# Altium PCB shudian2.pcbdoc
Units mm, origin at the board's own origin, x right, y up, seen from the top; angles counter-clockwise.
Board outline 96.52 x 96.39 mm, 2 copper layers (Top Layer, Bottom Layer); 31 components, 56 nets, 220 pads, 4 vias.
Unrouted connection lines stored in the file: 19.
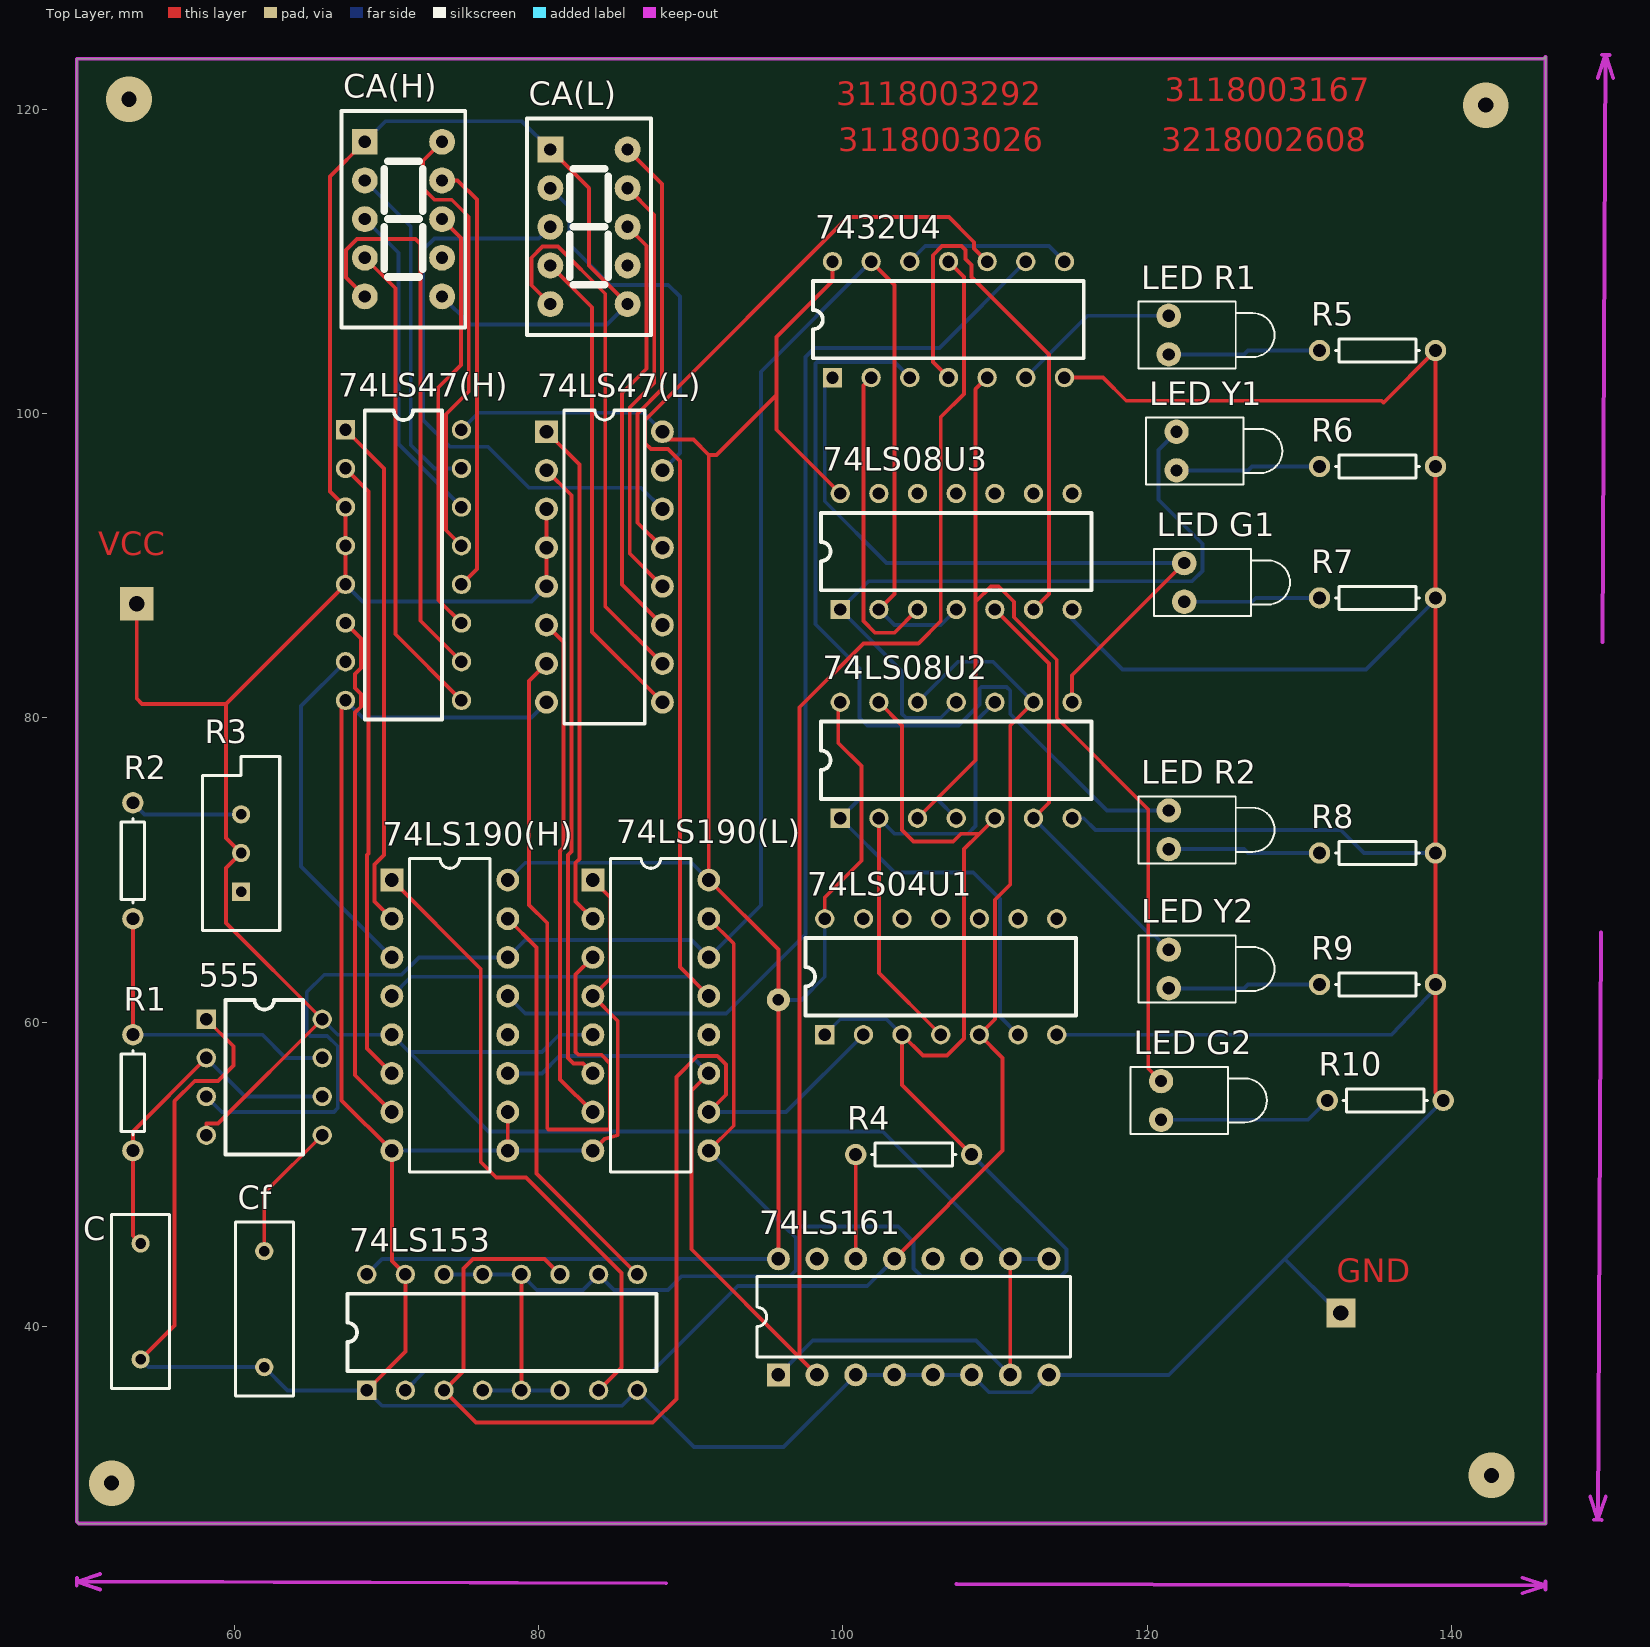
[diagram p0: Top Layer view]
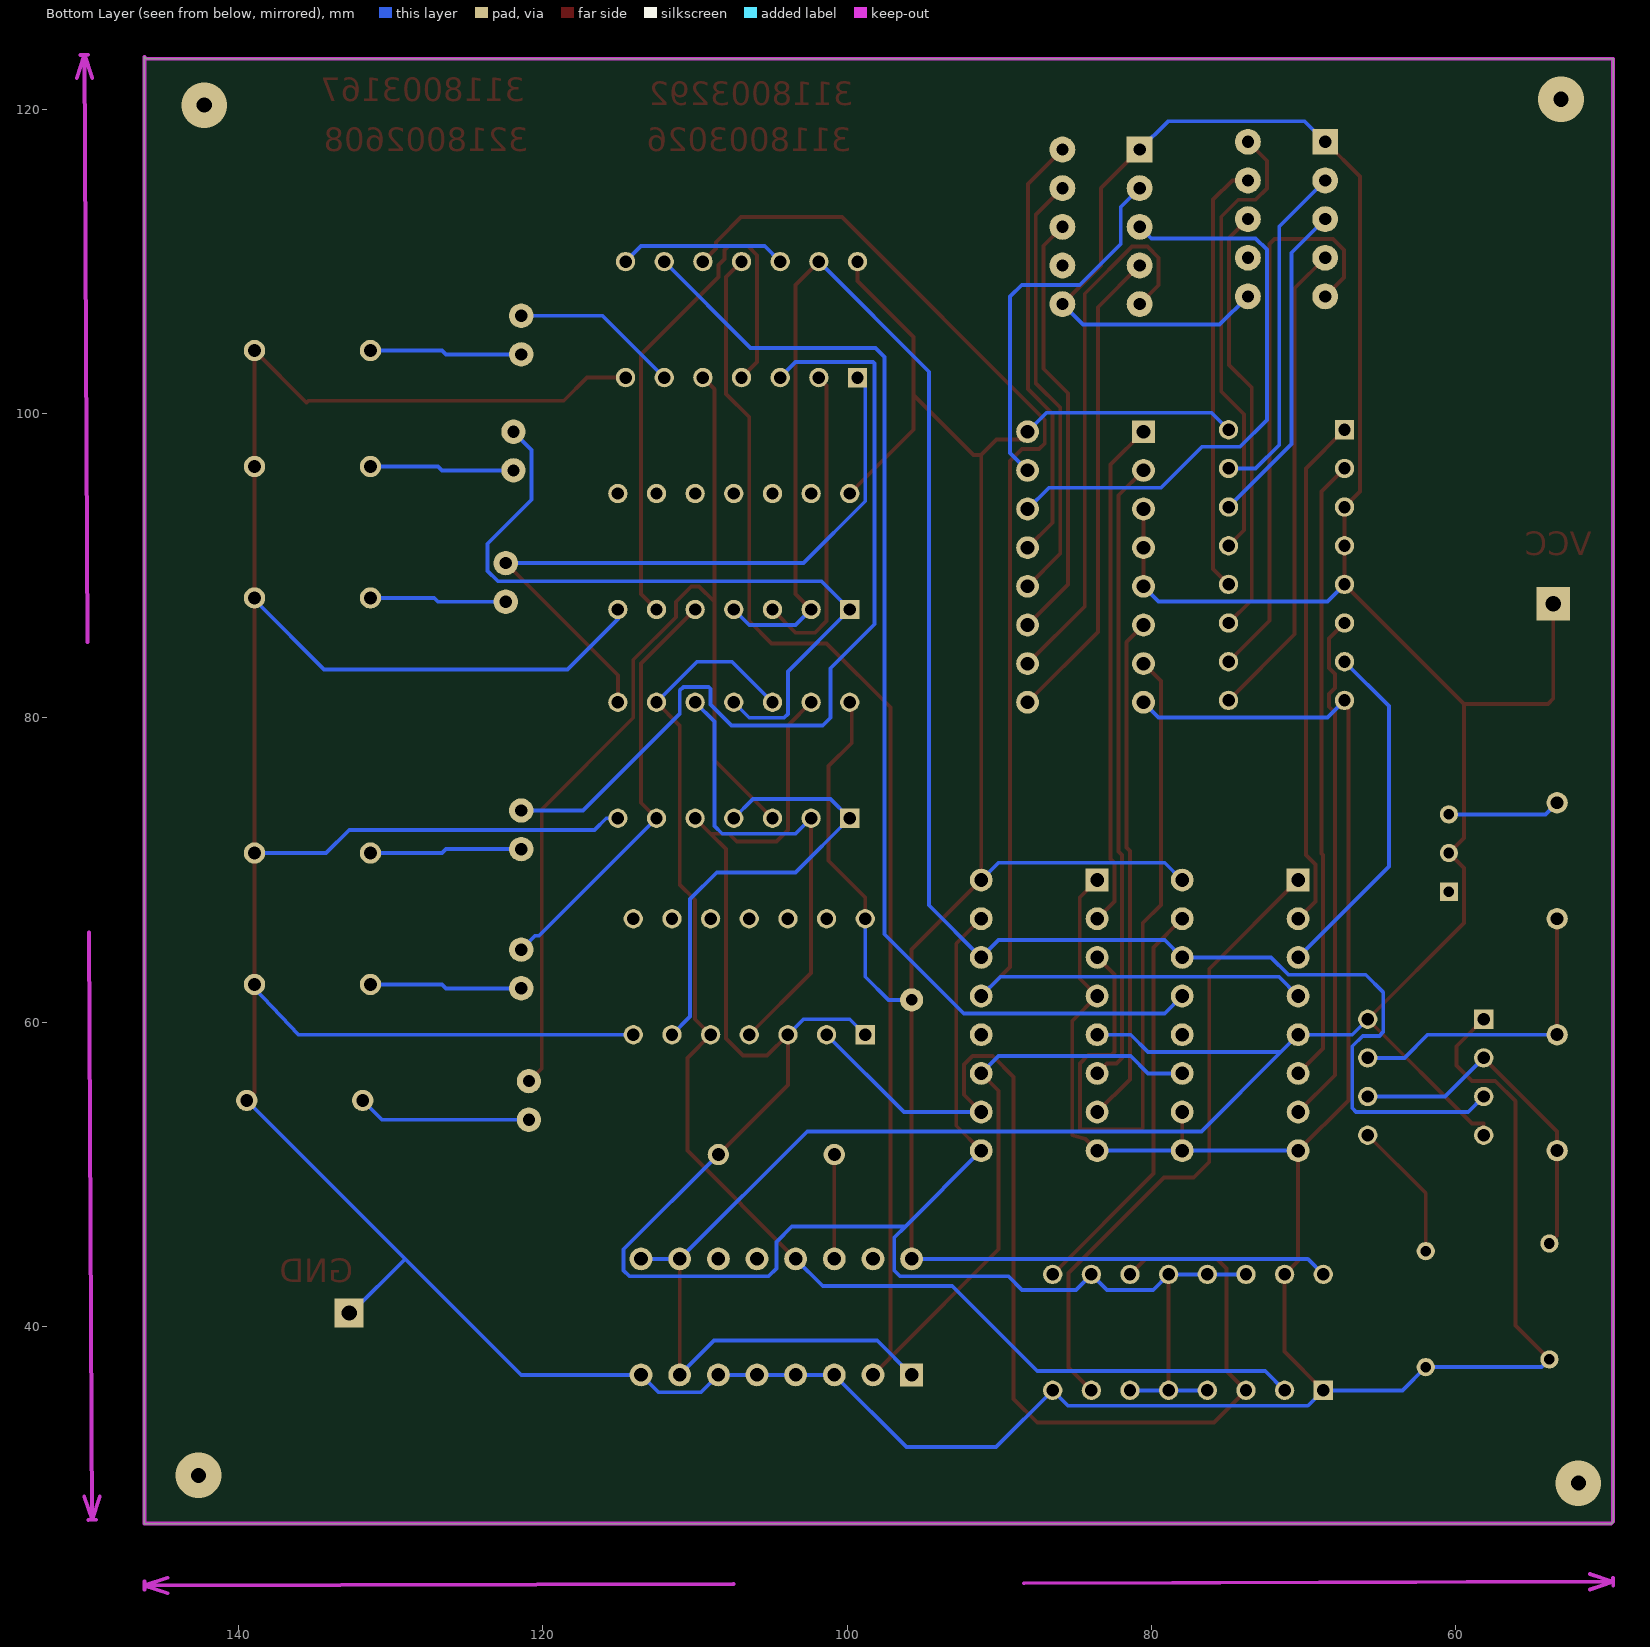
[diagram p1: Bottom Layer view, seen from below]

## Layer stack, top to bottom
Top Layer: signal copper 0.0356
Dielectric: dielectric 0.32, FR-4, Dk 4.8
Bottom Layer: signal copper 0.0356

## Board outline
49.657,27.178 49.784,27.051 146.177,27.051 146.177,123.444 146.05,123.317 49.657,123.317

## Design rules (kind name [scope] priority, off if disabled: settings)
Clearance [All] p1: gap=0.254
PolygonConnect [All] p1: connectstyle=Relief reliefconductorwidth=0.254 reliefentries=4 polygonreliefangle="90 Angle"
RoutingVias [All] p1: holewidth=0.711 width=1.27 viastyle="Through Hole" minholewidth=0.711 minwidth=1.27 maxholewidth=0.711 maxwidth=1.27
SilkscreenOverComponentPads [All] p1: minsilkscreentomaskgap=0
SolderMaskExpansion [All] p1: expansion=0.102
TestPointUsage [All] p1: valid=0 allowmultiple=FALSE
Testpoint [All] p1: side=15 testpointundercomponent=TRUE minsize=1.016 maxsize=2.54 preferedsize=1.524 minholesize=0 maxholesize=1.016 preferedholesize=0.813 testpointgrid=0.025 style=1023 order=0123456789
Width [All] p1: maxlimit=0.254 minlimit=0.254 preferedwidth=0.254
23 further rules are at their usual default settings.

## Components (designator, comment, footprint, x,y, rotation, side; value= is the part's Value field where it differs from the comment)
74LS04U1 "74LS04" DIP14 115.316,60.452 r90 top
74LS08U2 "74LS08" DIP14 116.332,74.676 r90 top
74LS08U3 "74LS08" DIP14 116.332,88.392 r90 top
74LS47(H) "SN7447A" DIP16 68.58,79.756 r0 top
74LS47(L) "SN7447A" DIP-16 84.328,89.916 r270 top
74LS153 "SN74LS153" DIP16 87.884,37.084 r90 top
74LS161 "74LS161A" DIP-16 104.648,40.64 r0 top
74LS190(H) "SN74LS190" DIP-16 74.168,60.452 r270 top
74LS190(L) "SN74LS190" DIP-16 87.376,60.452 r270 top
555 "555" DIP8 59.436,51.308 r0 top
7432U4 "7432" DIP14 115.824,103.632 r90 top
C "Cap" RAD-0.3 53.848,41.656 r90 top
CA(H) "Dpy Red-CA" "SMG 0.36-1P" 71.12,112.776 r0 top
CA(L) "Dpy Red-CA" "SMG 0.36-1P" 83.312,112.268 r0 top
Cf "Cap" RAD-0.3 61.976,41.148 r90 top
"LED G1" "LED1" LED-1 122.428,88.9 r0 top
"LED G2" "LED1" LED-1 120.904,54.864 r0 top
"LED R1" "LED1" LED-1 121.412,105.156 r0 top
"LED R2" "LED1" LED-1 121.412,72.644 r0 top
"LED Y1" "LED1" LED-1 121.92,97.536 r0 top
"LED Y2" "LED1" LED-1 121.412,63.5 r0 top
R1 "Res1" AXIAL-0.3 53.34,55.372 r90 top
R2 "Res1" AXIAL-0.3 53.34,70.612 r90 top
R3 "RPot" VR5 60.452,71.12 r90 top
R4 "Res1" AXIAL-0.3 104.648,51.308 r180 top
R5 "Res1" AXIAL-0.3 135.128,104.14 r0 top
R6 "Res1" AXIAL-0.3 135.128,96.52 r0 top
R7 "Res1" AXIAL-0.3 135.128,87.884 r0 top
R8 "Res1" AXIAL-0.3 135.128,71.12 r0 top
R9 "Res1" AXIAL-0.3 135.128,62.484 r0 top
R10 "Res1" AXIAL-0.3 135.636,54.864 r0 top

## Footprints (in the part's own frame and the unit in brackets; to place one, negate y for a bottom-side part, rotate by r counter-clockwise, add the part's x,y. Pads: shape width x height; smd on the part's side, far side on the other; paste and mask are expansions set on the pad)
AXIAL-0.3 [mm] "Resistor; 2 Leads"
  round 1.4 hole 0.85: 1(-3.81,0) 2(3.81,0)
  silkscreen extent -2.77,-0.76 2.77,0.76
DIP8 [mil] "STC"
  rect 50x50 hole 32: 1(-50,350)
  round 50 hole 32: 2(-50,250) 3(-50,150) 4(-50,50) 5(250,50) 6(250,150) 7(250,250) 8(250,350)
  silkscreen extent 0,0 200,400
DIP14 [mil] "STC"
  rect 50x50 hole 32: 1(-50,650)
  round 50 hole 32: 2(-50,550) 3(-50,450) 4(-50,350) 5(-50,250) 6(-50,150) 7(-50,50) 8(250,50) 9(250,150) 10(250,250) 11(250,350) 12(250,450) 13(250,550) 14(250,650)
  silkscreen extent 0,0 200,700
DIP16 [mil] "STC"
  rect 50x50 hole 32: 1(-50,755)
  round 50 hole 32: 2(-50,655) 3(-50,555) 4(-50,455) 5(-50,355) 6(-50,255) 7(-50,155) 8(-50,55) 9(250,55) 10(250,155) 11(250,255) 12(250,355) 13(250,455) 14(250,555) 15(250,655) 16(250,755)
  silkscreen extent 0,5 200,805
DIP-16 [mm] "DIP; 16 Leads; Row Spacing 7.62 mm; Pitch 2.54 mm"
  rect 1.5x1.5 hole 0.9: 1(-8.89,-3.81)
  round 1.5 hole 0.9: 2(-6.35,-3.81) 3(-3.81,-3.81) 4(-1.27,-3.81) 5(1.27,-3.81) 6(3.81,-3.81) 7(6.35,-3.81) 8(8.89,-3.81) 9(8.89,3.81) 10(6.35,3.81) 11(3.81,3.81) 12(1.27,3.81) 13(-1.27,3.81) 14(-3.81,3.81) 15(-6.35,3.81) 16(-8.89,3.81)
  silkscreen extent -10.3,-2.65 10.3,2.65
LED-1 [mm] "Typical RED GaAs LED; 2 Leads"
  round 1.6 hole 0.8: 1(0,1.27) 2(0,-1.27)
  silkscreen extent -2,-2.2 6.95,2.2
RAD-0.3 [mm] "Capacitor; 2 Leads"
  round 1.2 hole 0.7: 1(-3.81,0) 2(3.81,0)
  silkscreen extent -5.71,-1.91 5.71,1.91
"SMG 0.36-1P" [mm] "7.5*14*8.5mm(长宽厚)"
  rect 1.7x1.7 hole 0.8: 1(-2.54,5.08)
  round 1.7 hole 0.8: 2(-2.54,2.54) 3(-2.54,0) 4(-2.54,-2.54) 5(-2.54,-5.08) 6(2.54,-5.08) 7(2.54,-2.54) 8(2.54,0) 9(2.54,2.54) 10(2.54,5.08)
  silkscreen extent -4.06,-7.11 4.06,7.11, body extent -3.75,-7 3.75,7, height 8.5
VR5 [mm] "Potentiometer; 3 Leads"
  rect 1.2x1.2 hole 0.7: 1(-2.54,0)
  round 1.2 hole 0.7: 2(0,0) 3(2.54,0)
  silkscreen extent -5.08,-2.54 6.35,2.54

## Part data
74LS47(H) 74LS47(L): library part SN7446A, "BCD-To-SEVEN-SEGMENT DEC DRV"
74LS153: "DUAL 4-1 LINE DATA SELEC/MUX"
74LS161: "Synchronous 4-Bit Binary Counter with Direct Clear"
74LS190(H) 74LS190(L): "SYN UP/DOWN CNT DOWN/UP MODE CONTTOL"
C Cf: "Capacitor"
CA(H) CA(L): "7.62 mm Black Surface HER 7-Segment Display: CA, RH DP"
"LED G1" "LED G2" "LED R1" "LED R2" "LED Y1" "LED Y2": "Typical RED GaAs LED"
R1 R2 R4 R5 R6 R7 R8 R9 R10: "Resistor"
R3: "Potentiometer"

## Free pads (board coordinates)
  round 1.524 hole 0.762: 1(95.758,61.468)
  rect 2.2x2.2 hole 1: 2(53.594,87.503)
  rect 1.9x1.9 hole 1: 3(132.715,40.894)

## Via types
v1: diameter 3, hole 1, Top Layer to Bottom Layer, 4 vias

## Nets (pads, with @x,y where several pads share a name; then routed paths per layer and width w, separated by ;. In a path a pad name is that pad's centre, name@x,y a point inside that pad or via, vN(x,y) a via of type N, cw(c..) or ccw(c..) an arc to the next point about the centre after c; other vN are vias at no path point)
+5V: 74LS161.1 74LS161.7 74LS161.9 74LS161.10
GND: 74LS47(H).8 74LS47(L).8 74LS153.1 74LS153.8 74LS153.15 74LS161.3 74LS161.4 74LS161.5 74LS161.6 74LS161.8 74LS190(H).8 74LS190(H).9 74LS190(H).10 74LS190(L).1 74LS190(L).4 74LS190(L).8 555.1 C.1 Cf.1 R5.2 R6.2 R7.2 R8.2 R9.2 R10.2 | length 273.6
  Top Layer w0.254: C.1 56.083,40.081 56.083,54.813 57.404,56.134 58.928,56.134 59.944,57.15 59.944,58.42 555.1 ; 67.31,81.153 67.056,80.899 67.056,54.864 70.358,51.562 70.358,44.323 74LS153.15 71.247,38.354 74LS153.1 ; 77.978,51.562 77.978,54.102 ; 83.566,51.562 84.328,52.324 85.205,52.578 85.205,60.083 83.566,61.722 84.709,62.865 84.709,68.199 83.566,69.342 ; R5.2 R6.2 R7.2 R8.2 R9.2 138.938,55.372 R10.2
  Bottom Layer w0.254: C.1 54.356,37.338 Cf.1 63.5,35.814 74LS153.1 69.723,34.798 85.471,34.798 74LS153.8 90.221,32.08 96.088,32.08 74LS161.3 74LS161.4 74LS161.5 74LS161.6 109.601,35.687 112.395,35.687 74LS161.8 121.412,36.83 R10.2 ; 67.31,81.153 68.428,80.035 79.527,80.035 80.518,81.026 ; 70.358,51.562 77.978,51.562 83.566,51.562
Net74LS04U1_1: 74LS04U1.1 74LS04U1.3 74LS08U2.5 74LS08U2.13 74LS153.4 74LS153.5 74LS153.6 74LS153.10 74LS153.12 74LS153.13 74LS153.14 74LS190(L).9 74LS190(L).15 R4.1 | length 154.9
  Top Layer w0.254: 74LS153.5 74LS153.12 ; 91.186,51.562 92.825,53.201 92.825,65.163 91.186,66.802 ; 74LS08U2.13 103.886,79.502 103.886,72.644 104.648,71.882 107.251,71.882 107.759,72.39 108.966,72.39 ; R4.1 103.886,55.88 74LS04U1.3 105.258,57.81 106.832,57.81 107.95,58.928 107.95,71.374 108.966,72.39 ; 108.966,72.39 74LS08U2.5 108.966,72.39
  Bottom Layer w0.254: 74LS153.14 74LS153.13 74LS153.12 79.883,42.418 82.931,42.418 74LS153.10 84.963,42.418 88.494,42.418 89.383,43.307 96.52,43.307 96.901,43.688 96.901,45.847 96.164,46.584 ; 74LS153.4 74LS153.5 74LS153.6 ; 74LS04U1.1 99.822,60.198 102.87,60.198 74LS04U1.3 ; R4.1 114.681,45.085 114.681,43.688 114.3,43.307 105.156,43.307 104.648,43.815 104.648,45.568 103.632,46.584 96.164,46.584 ; 96.164,46.584 91.186,51.562 96.164,46.584
Net74LS04U1_2: 74LS04U1.2 74LS153.3 74LS153.11 74LS190(L).10 | length 73.4
  Top Layer w0.254: 74LS153.11 80.391,44.45 75.692,44.45 75.057,43.815 75.057,37.084 74LS153.3 75.895,33.706 87.503,33.706 89.052,35.255 89.052,56.413 90.424,57.785 91.745,57.785 92.317,57.213 92.317,55.233 91.186,54.102
  Bottom Layer w0.254: 91.186,54.102 96.266,54.102 74LS04U1.2
Net74LS04U1_4: 74LS04U1.4 74LS08U2.2 74LS08U2.10 | length 31.5
  Top Layer w0.254: 74LS08U2.2 102.362,63.246 74LS04U1.4
  Bottom Layer w0.254: 74LS08U2.2 103.378,72.39 108.204,72.39 108.712,72.898 108.712,79.756 74LS08U2.10
Net74LS04U1_5: 74LS04U1.5 74LS08U2.9 74LS08U2.12 74LS153.2 74LS161.13 | length 87.2
  Top Layer w0.254: 74LS161.13 110.49,51.562 110.49,57.658 74LS04U1.5 109.982,60.198 109.982,68.047 110.998,69.063 110.998,79.502 74LS08U2.9
  Bottom Layer w0.254: 74LS153.2 72.517,37.084 87.503,37.084 93.091,42.672 101.6,42.672 74LS161.13 ; 74LS08U2.12 107.569,83.693 109.855,83.693 74LS08U2.9
Net74LS04U1_6: 74LS04U1.6 74LS08U2.1 74LS08U2.4 | length 30.8
  Bottom Layer w0.254: 74LS08U2.4 106.172,74.676 101.092,74.676 74LS08U2.1 103.378,69.85 108.56,69.85 110.312,68.097 110.312,60.376 74LS04U1.6
Net74LS08U2_3: 74LS08U2.3 7432U4.5 "LED G2.1" | length 80.1
  Top Layer w0.254: 74LS08U2.3 108.712,77.216 ; 7432U4.5 108.712,101.6 108.712,87.63 ; 120.904,56.134 120.066,56.972 120.066,73.99 114.046,80.01 114.046,83.82 111.252,86.614 111.252,87.63 110.236,88.646 109.728,88.646 108.712,87.63 ; 108.712,77.216 108.712,87.63 ; 108.712,77.216 108.712,87.63
Net74LS08U2_6: 74LS08U2.6 74LS08U3.5 "LED Y2.1" | length 28.1
  Top Layer w0.254: 74LS08U3.5 113.538,83.566 113.538,74.422 74LS08U2.6
  Bottom Layer w0.254: 74LS08U2.6 120.244,65.684 120.498,65.684 121.412,64.77
Net74LS08U2_8: 74LS08U2.8 7432U4.1 "LED G1.1" | length 46.1
  Top Layer w0.254: 74LS08U2.8 115.062,82.804 122.428,90.17
  Bottom Layer w0.254: 7432U4.1 98.806,102.362 98.806,94.234 102.87,90.17 122.428,90.17
Net74LS08U2_11: 74LS08U2.11 74LS08U3.1 "LED Y1.1" | length 48.3
  Bottom Layer w0.254: 74LS08U2.11 106.426,80.01 104.14,80.01 103.886,80.264 103.886,83.058 74LS08U3.1 101.676,88.976 122.936,88.976 123.622,89.662 123.622,91.44 120.726,94.336 120.726,97.612 121.92,98.806
Net74LS08U3_2: 74LS08U3.2 74LS08U3.4 74LS190(H).14 74LS190(L).14 555.3 7432U4.13 | length 126.5
  Top Layer w0.254: 7432U4.13 103.378,108.458 103.378,88.138 74LS08U3.2
  Bottom Layer w0.254: 555.3 59.182,54.102 66.548,54.102 66.802,54.356 66.802,58.42 66.116,59.106 65.024,59.106 64.77,59.36 64.77,61.976 65.913,63.119 70.993,63.119 72.136,64.262 77.978,64.262 79.121,65.405 90.043,65.405 91.186,64.262 94.615,67.691 94.615,102.743 7432U4.13 ; 74LS08U3.2 103.378,86.106 106.426,86.106 74LS08U3.4
Net74LS08U3_3: 74LS08U3.3 7432U4.2 | length 20.7
  Top Layer w0.254: 7432U4.2 101.346,101.854 101.346,86.36 102.108,85.598 103.378,85.598 74LS08U3.3
Net74LS08U3_6: 74LS08U3.6 7432U4.4 | length 37.3
  Top Layer w0.254: 7432U4.4 105.918,103.378 105.918,110.403 106.513,110.998 107.798,110.998 108.052,110.744 108.052,110.16 108.458,109.753 108.458,108.966 113.538,103.886 113.538,88.138 74LS08U3.6
Net74LS47(H)_1: 74LS47(H).1 74LS190(H).2 | length 33.9
  Top Layer w0.254: 67.31,98.933 69.85,96.393 69.85,70.993 69.227,70.37 69.227,67.933 70.358,66.802
Net74LS47(H)_2: 74LS47(H).2 74LS190(H).6 | length 41.1
  Top Layer w0.254: 67.31,96.393 68.834,94.869 68.834,71.096 68.719,70.981 68.719,58.281 70.358,56.642
Net74LS47(H)_6: 74LS47(H).6 74LS190(H).7 | length 34
  Top Layer w0.254: 67.31,86.233 68.326,85.217 68.326,83.272 67.945,82.891 67.945,81.955 68.326,81.574 68.326,80.732 67.945,80.351 67.945,56.515 70.358,54.102
Net74LS47(H)_7: 74LS47(H).7 74LS190(H).3 | length 23.1
  Bottom Layer w0.254: 67.31,83.693 64.389,80.772 64.389,70.231 70.358,64.262
Net74LS47(H)_9: 74LS47(H).9 CA(H).4 | length 31.7
  Top Layer w0.254: 68.58,110.236 70.587,108.229 70.587,85.496 74.93,81.153
Net74LS47(H)_10: 74LS47(H).10 CA(H).5 | length 37.5
  Top Layer w0.254: 68.58,107.696 67.335,108.941 67.335,110.744 68.072,111.481 71.907,111.481 72.238,111.15 72.238,86.385 74.93,83.693
Net74LS47(H)_11: 74LS47(H).11 CA(H).8 | length 28.3
  Top Layer w0.254: 73.66,112.776 74.905,111.531 74.905,103.2 73.406,101.702 73.406,87.757 74.93,86.233
Net74LS47(H)_12: 74LS47(H).12 CA(H).9 | length 28.5
  Top Layer w0.254: 73.66,115.316 74.684,115.316 75.946,114.054 75.946,89.789 74.93,88.773
Net74LS47(H)_13: 74LS47(H).13 CA(H).10 | length 30
  Top Layer w0.254: 73.66,117.856 72.415,116.611 72.415,114.783 73.152,114.046 74.295,114.046 75.413,112.928 75.413,101.448 73.914,99.949 73.914,92.329 74.93,91.313
Net74LS47(H)_14: 74LS47(H).14 CA(H).3 | length 21.6
  Bottom Layer w0.254: 68.58,112.776 70.79,110.566 70.79,97.993 74.93,93.853
Net74LS47(H)_15: 74LS47(H).15 CA(H).2 | length 22.6
  Bottom Layer w0.254: 68.58,115.316 71.603,112.293 71.603,97.942 73.152,96.393 74.93,96.393
Net74LS47(L)_1: 74LS47(L).1 74LS190(L).2 | length 33.5
  Top Layer w0.254: 80.518,98.806 82.677,96.647 82.677,70.727 82.435,70.485 82.435,67.933 83.566,66.802
Net74LS47(L)_2: 74LS47(L).2 74LS190(L).6 | length 41.4
  Top Layer w0.254: 80.518,96.266 82.157,94.627 82.157,71.211 81.927,70.981 81.927,57.658 82.292,57.293 82.915,57.293 83.566,56.642
Net74LS47(L)_6: 74LS47(L).6 74LS190(L).7 | length 33.5
  Top Layer w0.254: 80.518,86.106 81.649,84.975 81.649,71.489 81.419,71.259 81.419,56.249 83.566,54.102
Net74LS47(L)_7: 74LS47(L).7 74LS190(L).3 | length 49.2
  Top Layer w0.254: 80.518,83.566 79.375,82.423 79.375,67.716 80.569,66.523 80.569,53.035 80.645,52.959 84.672,52.959 84.697,52.984 84.697,57.289 84.125,57.861 82.613,57.861 82.435,58.039 82.435,63.131 83.566,64.262
Net74LS47(L)_9: 74LS47(L).9 CA(L).4 | length 31.8
  Top Layer w0.254: 80.772,109.728 83.515,106.985 83.515,85.649 88.138,81.026
Net74LS47(L)_10: 74LS47(L).10 CA(L).5 | length 35.9
  Top Layer w0.254: 80.772,107.188 79.527,108.433 79.527,110.236 80.264,110.973 81.28,110.973 84.379,107.874 84.379,87.325 88.138,83.566
Net74LS47(L)_11: 74LS47(L).11 CA(L).8 | length 28.4
  Top Layer w0.254: 85.852,112.268 87.097,111.023 87.097,102.946 85.483,101.333 85.483,88.761 88.138,86.106
Net74LS47(L)_12: 74LS47(L).12 CA(L).9 | length 28.4
  Top Layer w0.254: 85.852,114.808 87.605,113.055 87.605,102.009 85.991,100.396 85.991,90.793 88.138,88.646
Net74LS47(L)_13: 74LS47(L).13 CA(L).10 | length 28.4
  Top Layer w0.254: 85.852,117.348 88.113,115.087 88.113,101.6 86.499,99.986 86.499,92.825 88.138,91.186
Net74LS47(L)_14: 74LS47(L).14 CA(L).3 | length 38.3
  Bottom Layer w0.254: 80.772,112.268 80.01,111.506 73.152,111.506 72.415,110.769 72.415,99.568 74.168,97.815 76.683,97.815 79.375,95.123 86.741,95.123 88.138,93.726
Net74LS47(L)_15: 74LS47(L).15 CA(L).2 | length 24.8
  Bottom Layer w0.254: 80.772,114.808 82.017,113.563 82.017,111.15 84.709,108.458 88.519,108.458 89.281,107.696 89.281,97.409 88.138,96.266
Net74LS153_7: 74LS153.7 74LS190(H).1 | length 41.5
  Top Layer w0.254: 70.358,69.342 76.2,63.5 76.2,50.825 77.216,49.809 79.172,49.809 85.446,43.536 85.446,37.313 74LS153.7
Net74LS153_9: 74LS153.9 74LS190(H).15 | length 26.9
  Top Layer w0.254: 77.978,66.802 79.858,64.922 79.858,50.063 74LS153.9
Net74LS161_2: 74LS161.2 74LS190(H).11 74LS190(L).11 7432U4.11 | length 118.5
  Top Layer w0.254: 91.186,56.642 90.043,55.499 90.043,45.085 97.155,37.973 ; 7432U4.11 107.95,108.966 107.95,101.295 106.426,99.771 106.426,86.36 104.953,84.887 101.346,84.887 97.155,80.696 97.155,37.973 ; 97.155,37.973 74LS161.2 97.155,37.973
  Bottom Layer w0.254: 77.978,56.642 80.213,56.642 81.356,57.785 90.043,57.785 91.186,56.642
Net74LS161_14: 74LS161.14 R4.2 | length 6.9
  Top Layer w0.254: 74LS161.14 R4.2
Net74LS190(H)_4: 74LS190(H).4 74LS190(L).13 7432U4.10 | length 91.6
  Top Layer w0.254: 91.186,61.722 89.281,63.627 89.281,96.876 88.494,97.663 87.376,97.663 87.007,98.032 87.007,99.568 100.342,112.903 106.965,112.903 108.362,111.506 108.616,111.252 108.616,110.84 7432U4.10
  Bottom Layer w0.254: 70.358,61.722 71.628,62.992 89.916,62.992 91.186,61.722
Net74LS190(H)_13: 74LS190(H).13 7432U4.9 | length 77.2
  Bottom Layer w0.254: 77.978,61.722 79.121,60.579 92.329,60.579 97.536,65.786 97.536,103.72 98.134,104.318 106.35,104.318 7432U4.9
Net555_2: 555.2 555.6 C.2 R1.1 | length 23.1
  Top Layer w0.254: C.2 53.34,45.974 R1.1 53.34,52.832 555.2
  Bottom Layer w0.254: 555.2 60.706,55.118 555.6
Net555_5: 555.5 Cf.2 | length 9.2
  Top Layer w0.254: Cf.2 61.976,48.768 555.5
Net555_7: 555.7 R1.2 R2.1 | length 20.7
  Top Layer w0.254: R1.2 R2.1
  Bottom Layer w0.254: R1.2 61.849,59.182 63.373,57.658 555.7
Net7432U4_3: 7432U4.3 "LED R2.1" | length 57.6
  Bottom Layer w0.254: 7432U4.3 103.378,103.378 98.298,103.378 98.196,103.276 98.196,86.157 101.092,83.261 101.092,80.01 101.6,79.502 107.594,79.502 108.966,80.874 108.966,81.915 109.093,82.042 110.744,82.042 110.998,81.788 110.998,80.264 117.348,73.914 121.412,73.914
Net7432U4_6: 7432U4.6 "LED R1.1" | length 11.1
  Bottom Layer w0.254: 7432U4.6 116.078,106.426 121.412,106.426
Net7432U4_8: 7432U4.8 7432U4.12 | length 11
  Bottom Layer w0.254: 7432U4.12 105.41,110.998 113.538,110.998 7432U4.8
"NetLED G1_2": "LED G1.2" R7.1 | length 9
  Bottom Layer w0.254: 122.428,87.63 126.873,87.63 127.127,87.884 R7.1
"NetLED G2_2": "LED G2.2" R10.1 | length 11.4
  Bottom Layer w0.254: 120.904,53.594 130.556,53.594 R10.1
"NetLED R1_2": "LED R1.2" R5.1 | length 10
  Bottom Layer w0.254: 121.412,103.886 126.365,103.886 126.619,104.14 R5.1
"NetLED R2_2": "LED R2.2" R8.1 | length 10
  Bottom Layer w0.254: 121.412,71.374 126.365,71.374 126.619,71.12 R8.1
"NetLED Y1_2": "LED Y1.2" R6.1 | length 9.5
  Bottom Layer w0.254: 121.92,96.266 126.619,96.266 126.873,96.52 R6.1
"NetLED Y2_2": "LED Y2.2" R9.1 | length 10
  Bottom Layer w0.254: 121.412,62.23 126.365,62.23 126.619,62.484 R9.1
NetR2_2: R2.2 R3.1 R3.3 | length 7.4
  Bottom Layer w0.254: R2.2 54.102,73.66 R3.3
VCC: 74LS47(H).3 74LS47(H).4 74LS47(H).5 74LS47(H).16 74LS47(L).3 74LS47(L).4 74LS47(L).5 74LS47(L).16 74LS153.16 74LS161.16 74LS190(H).5 74LS190(H).16 74LS190(L).5 74LS190(L).16 555.4 555.8 CA(H).1 CA(H).6 CA(L).1 CA(L).6 pad.1 R3.2 | length 114.2
  Top Layer w0.254: 87.928,98.298 90.17,98.298 91.186,97.282 91.186,69.342 95.758,64.77 74LS161.16
  Bottom Layer w0.254: 74LS153.16 69.723,44.45 74LS161.16 ; 74.93,98.933 76.048,100.051 86.893,100.051 88.138,98.806 ; 77.978,69.342 79.121,70.485 90.043,70.485 91.186,69.342
pads on no net: 74LS04U1.7 74LS04U1.8 74LS04U1.9 74LS04U1.10 74LS04U1.11 74LS04U1.12 74LS04U1.13 74LS04U1.14 74LS08U2.7 74LS08U2.14 74LS08U3.7 74LS08U3.8 74LS08U3.9 74LS08U3.10 74LS08U3.11 74LS08U3.12 74LS08U3.13 74LS08U3.14 74LS161.11 74LS161.12 74LS161.15 74LS190(H).12 74LS190(L).12 7432U4.7 7432U4.14 CA(H).7 CA(L).7
copper on no net: | length 398.7
  Top Layer w0.254: 53.594,87.249 53.594,81.28 53.95,80.924 59.461,80.924 ; 58.166,52.578 58.166,53.34 58.928,53.34 65.786,60.198 59.461,66.523 59.461,70.129 60.452,71.12 59.461,72.111 59.461,80.924 ; 68.58,117.856 66.294,115.57 66.294,94.869 67.31,93.853 67.31,91.313 67.31,88.773 59.461,80.924 ; 80.518,88.646 80.518,91.186 80.518,93.726 ; 80.772,117.348 83.312,114.808 83.312,109.728 85.852,107.188 ; 91.186,97.282 91.694,97.282 95.631,101.219 ; 98.806,67.183 98.806,68.199 101.219,70.612 101.219,76.835 99.695,78.359 99.695,81.153 ; 99.314,109.982 99.314,108.712 95.631,105.029 95.631,98.933 99.822,94.742 ; 110.998,36.83 110.998,44.45 ; 114.554,102.362 117.094,102.362 118.618,100.838 135.382,100.838 135.509,100.711 138.938,104.14
  Bottom Layer w0.254: 65.786,60.198 66.802,59.182 70.358,59.182 ; 67.31,88.773 68.428,87.655 79.527,87.655 80.518,88.646 ; 68.58,117.856 69.926,119.202 78.918,119.202 80.772,117.348 ; 73.66,107.696 75.514,105.842 84.506,105.842 85.852,107.188 ; 83.566,59.182 81.356,59.182 80.213,58.039 71.501,58.039 ; 95.758,36.83 98.019,39.091 108.737,39.091 110.998,36.83 ; 95.758,61.468 97.282,61.468 98.806,62.992 98.806,66.802 ; 113.538,44.45 110.998,44.45 102.616,52.832 76.708,52.832 71.501,58.039 ; 114.046,59.182 136.054,59.182 138.938,62.23 138.938,62.484 ; 115.062,73.406 115.824,73.406 116.586,72.644 132.715,72.644 134.239,71.12 138.938,71.12 ; 115.062,87.122 115.062,86.487 118.364,83.185 134.366,83.185 138.811,87.63 ; 129.033,44.449 132.588,40.894 132.715,40.894 ; 70.358,59.182 71.501,58.039 ; 70.358,59.182 71.501,58.039
  other v1: 51.943,29.718 142.621,30.226 142.24,120.269 53.086,120.65

## Keep-outs
Keep-Out Layer:
  lines w0.254: 49.656,22.987 49.658,23.495 ; 51.18,22.729 49.657,23.241 ; 51.182,23.745 49.657,23.241 ; 88.37,23.139 49.657,23.241 ; 107.464,23.089 146.177,22.987 ; 144.652,22.483 146.177,22.987 ; 144.654,23.499 146.177,22.987 ; 146.176,22.733 146.178,23.241 ; 149.106,28.832 149.606,27.305 ; 149.352,27.306 149.86,27.304 ; 149.598,122.05 150.114,123.571 ; 149.81,65.891 149.606,27.305 ; 149.86,123.572 150.368,123.57 ; 149.91,84.985 150.114,123.571 ; 150.122,28.826 149.606,27.305 ; 150.614,122.044 150.114,123.571 ; 49.657,27.178 49.784,27.051 146.177,27.051 146.177,123.444 146.05,123.317 49.657,123.317 49.657,27.178
  text "96.26734 (mm)" at 150.725,66.14 h1.52 r89.7
  text "96.52034 (mm)" at 88.621,22.224 h1.52 r359.85

## Other copper
Top Layer:
  text "3118003167" at 121.158,120.523 h1.52
  text "3118003292" at 99.568,120.269 h1.52
  text "3118003026" at 99.695,117.221 h1.52
  text "3218002608" at 120.904,117.221 h1.52
  text "VCC" at 51.054,90.678 h1.52
  text "GND" at 132.461,42.926 h1.52